# Altium PCB PCB2.PcbDoc
Units mm, origin at the board's own origin, x right, y up, seen from the top; angles counter-clockwise.
Board outline 49.4 x 31.11 mm, 2 copper layers (Top Layer, Bottom Layer); 15 components, 15 nets, 52 pads, 1 vias.
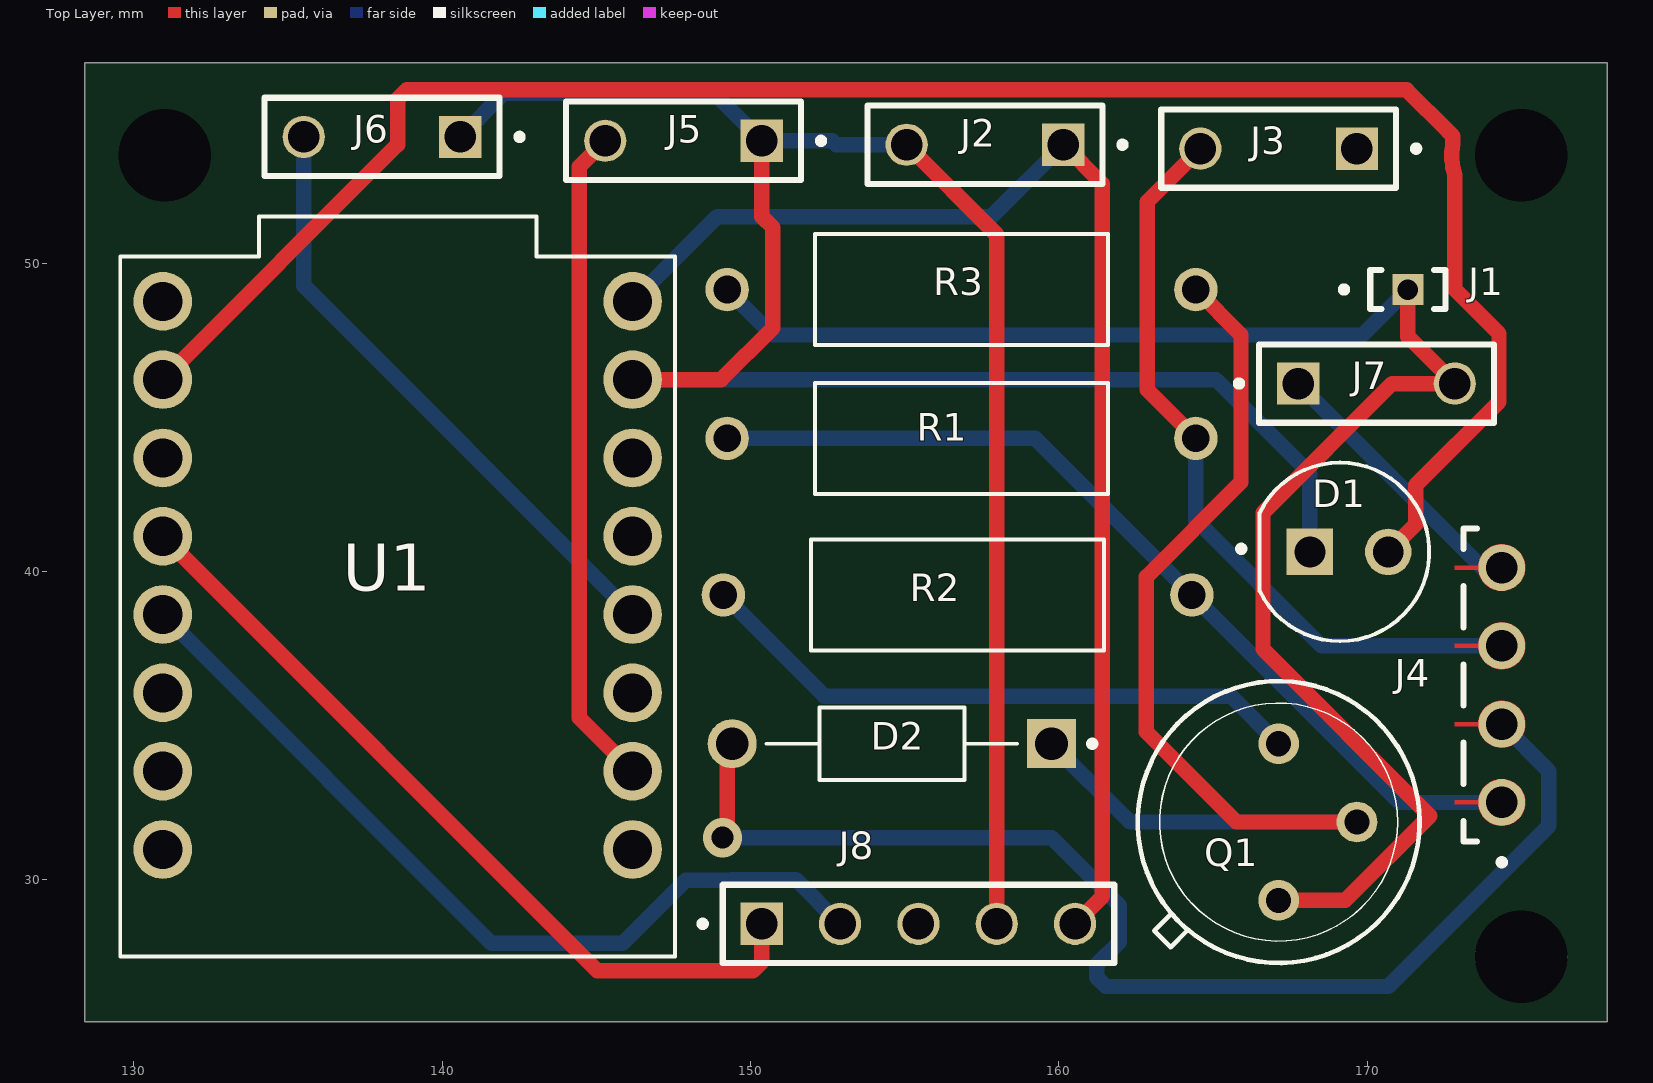
[diagram p0: Top Layer view]
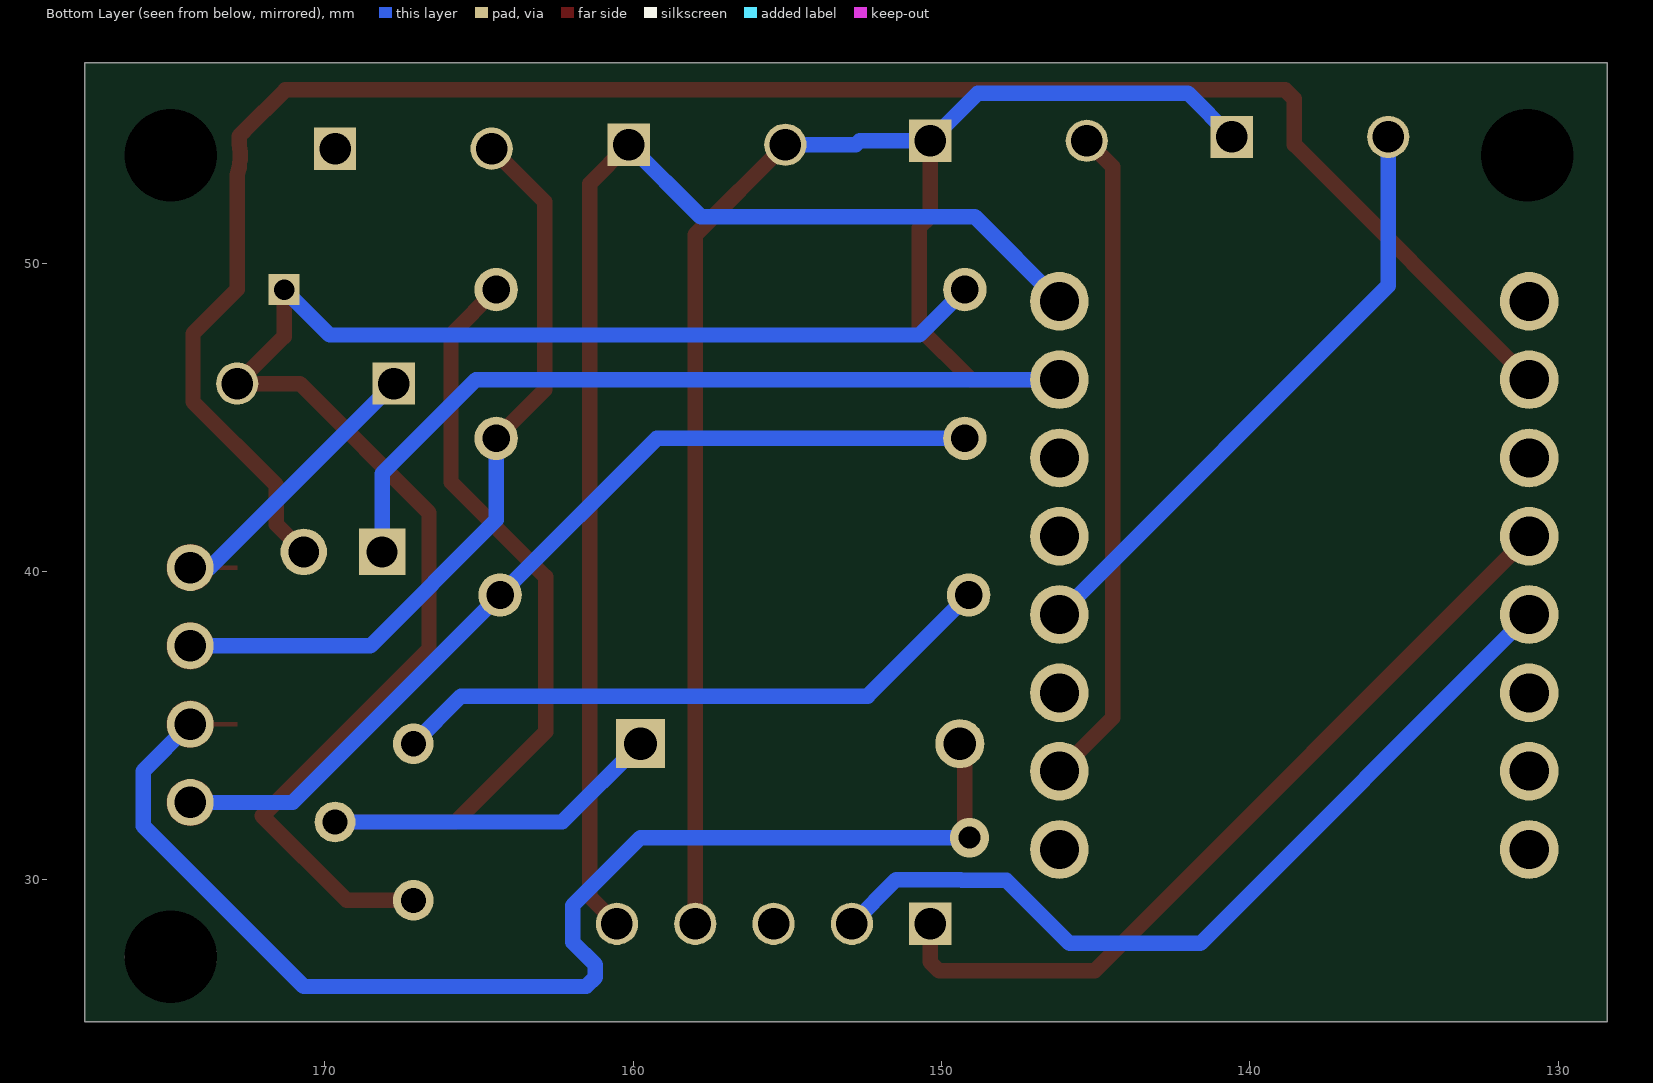
[diagram p1: Bottom Layer view, seen from below]

## Layer stack, top to bottom
Top Solder: solder mask 0.0102, Solder Resist, Dk 3.5
Top Layer: signal copper 0.0356
Dielectric 1: dielectric 0.32, FR-4, Dk 4.8
Bottom Layer: signal copper 0.0356
Bottom Solder: solder mask 0.0102, Solder Resist, Dk 3.5

## Board outline
128.397,25.4 177.8,25.4 177.8,56.515 128.397,56.515

## Design rules (kind name [scope] priority, off if disabled: settings)
Clearance [All] p1: gap=0.5 ignorepadtopadclearanceinfootprint=FALSE
PolygonConnect [All] p1: connectstyle=Relief reliefconductorwidth=0.254 reliefentries=4 polygonreliefangle="90 Angle" airgapwidth=0.254
RoutingVias [All] p1: holewidth=0.711 width=1.27 viastyle="Through Hole" minholewidth=0.711 minwidth=1.27 maxholewidth=0.711 maxwidth=1.27
SilkToSilkClearance [All] p1: silktosilkclearance=0.2
SilkToSolderMaskClearance [IsPad] p1 off: minsilkscreentomaskgap=0.21 clearancetoexposedcopper=TRUE
SolderMaskExpansion [All] p1: expansion=0.102 istentingtop=FALSE
Width [All] p1: maxlimit=1 minlimit=0.4 preferedwidth=0.5
28 further rules are at their usual default settings.

## Components (designator, comment, footprint, x,y, rotation, side; value= is the part's Value field where it differs from the comment)
D1 "151054RS03000" LED_151054RS03000 169.418,40.64 r0 top
D2 "1N4007G" DIOAD1036W78L470D235 154.586,34.417 r180 top
J1 "BAT-" SAMTEC_TMS-101-21-G-S 171.323,49.149 r90 top
J2 "S4" ? 160.147,53.848 r180 top
J3 "S1" ? 169.672,53.721 r180 top
J4 "RGB led" SAMTEC_MTLW-104-X-X-S-X 174.371,36.322 r270 top
J5 "S2" ? 150.368,53.975 r180 top
J6 "S3" ? 140.589,54.102 r180 top
J7 "S4" ? 167.767,46.101 r0 top
J8 "RTC" SAMTEC_TSW-105-23-L-S 150.368,28.575 r0 top
Q1 "BC547*" TO39 167.132,31.877 r0 top
R1 "1K" RESAD1520W70L1030D380 156.845,44.323 r180 top
R2 "220R" RESAD1520W70L1030D380 156.718,39.243 r180 top
R3 "1K" RESAD1520W70L1030D380 156.845,49.149 r180 top
U1 "ESP32-C3_SUPERMINI" MODULE_ESP32-C3_SUPERMINI 138.557,38.868 r0 top

## Footprints (in the part's own frame and the unit in brackets; to place one, negate y for a bottom-side part, rotate by r counter-clockwise, add the part's x,y. Pads: shape width x height; smd on the part's side, far side on the other; paste and mask are expansions set on the pad)
DIOAD1036W78L470D235 [mm]
  round 1.59 hole 1.06: A(5.18,0)
  rect 1.59x1.59 / inner round 1.59 / far side rect 1.59x1.59 hole 1.06: C(-5.18,0)
  silkscreen extent -6.6,-1.18 4.06,1.18, body extent -5.65,-1.4 5.65,1.4, height 2.8
LED_151054RS03000 [mm]
  round 1.508 hole 1: A(1.27,0)
  rect 1.508x1.508 / inner round 1.508 / far side rect 1.508x1.508 hole 1: C(-1.27,0)
  silkscreen extent -3.6,-2.9 2.6,2.9, body extent -2.9,-2.9 2.51,2.9, height 12.1
MODULE_ESP32-C3_SUPERMINI [mm]
  round 1.905 hole 1.27: 0(7.62,-7.88) 1(7.62,-5.34) 2(7.62,-2.8) 3(7.62,-0.26) 3.3(7.62,4.82) 4(7.62,2.28) 5(-7.62,9.9) 5V(7.62,9.9) 6(-7.62,7.36) 7(-7.62,4.82) 8(-7.62,2.28) 9(-7.62,-0.26) 10(-7.62,-2.8) 20(-7.62,-5.34) 21(-7.62,-7.88) G(7.62,7.36)
  silkscreen extent -9,-11.35 9,12.65
RESAD1520W70L1030D380 [mm]
  round 1.408 hole 0.9: 1(-7.6,0) 2(7.6,0)
  silkscreen extent -4.75,-1.8 4.75,1.8, body extent -6.3,-1.53 6.3,1.27, height 2.92
SAMTEC_MTLW-104-X-X-S-X [mm]
  round 1.52 hole 1.02: 01(3.81,0) 02(1.27,0) 03(-1.27,0) 04(-3.81,0)
  Top Layer region: 3.889,0.756 3.968,0.743 4.045,0.723 4.119,0.694 4.19,0.658 4.257,0.615 4.319,0.565 4.375,0.509 4.425,0.447 4.468,0.38 4.504,0.309 4.533,0.235 4.553,0.158 4.566,0.079 4.57,0 4.569,-0.038 4.566,-0.076 4.562,-0.113 4.555,-0.151 4.547,-0.187 4.537,-0.224 4.525,-0.259 4.511,-0.294 4.496,-0.329 4.479,-0.363 4.46,-0.395 4.44,-0.427 4.418,-0.458 4.395,-0.487 4.37,-0.516 4.344,-0.543 4.316,-0.569 4.287,-0.593 4.258,-0.616 4.227,-0.638 4.195,-0.658 4.162,-0.676 4.128,-0.692 4.093,-0.707 4.058,-0.721 4.022,-0.732 3.986,-0.742 3.949,-0.75 3.912,-0.756 3.875,-0.76 3.875,-1.53 3.745,-1.53 3.745,-0.76 3.708,-0.756 3.671,-0.75 3.634,-0.742 3.598,-0.732 3.562,-0.721 3.527,-0.707 3.492,-0.692 3.458,-0.676 3.425,-0.658 3.393,-0.638 3.362,-0.616 3.333,-0.593 3.304,-0.569 3.276,-0.543 3.25,-0.516 3.225,-0.487 3.202,-0.458 3.18,-0.427 3.16,-0.395 3.141,-0.363 3.124,-0.329 3.109,-0.294 3.095,-0.259 3.083,-0.224 3.073,-0.187 3.065,-0.151 3.058,-0.113 3.054,-0.076 3.051,-0.038 3.05,0 3.054,0.079 3.067,0.158 3.087,0.235 3.116,0.309 3.152,0.38 3.195,0.447 3.245,0.509 3.301,0.565 3.363,0.615 3.43,0.658 3.501,0.694 3.575,0.723 3.652,0.743 3.731,0.756 3.81,0.76
  Top Layer region: 1.349,0.756 1.428,0.743 1.505,0.723 1.579,0.694 1.65,0.658 1.717,0.615 1.779,0.565 1.835,0.509 1.885,0.447 1.928,0.38 1.964,0.309 1.993,0.235 2.013,0.158 2.026,0.079 2.03,0 2.029,-0.038 2.026,-0.076 2.022,-0.113 2.015,-0.151 2.007,-0.187 1.997,-0.224 1.985,-0.259 1.971,-0.294 1.956,-0.329 1.939,-0.363 1.92,-0.395 1.9,-0.427 1.878,-0.458 1.855,-0.487 1.83,-0.516 1.804,-0.543 1.776,-0.569 1.747,-0.593 1.718,-0.616 1.687,-0.638 1.655,-0.658 1.622,-0.676 1.588,-0.692 1.553,-0.707 1.518,-0.721 1.482,-0.732 1.446,-0.742 1.409,-0.75 1.372,-0.756 1.335,-0.76 1.335,-1.53 1.205,-1.53 1.205,-0.76 1.168,-0.756 1.131,-0.75 1.094,-0.742 1.058,-0.732 1.022,-0.721 0.987,-0.707 0.952,-0.692 0.918,-0.676 0.885,-0.658 0.853,-0.638 0.822,-0.616 0.793,-0.593 0.764,-0.569 0.736,-0.543 0.71,-0.516 0.685,-0.487 0.662,-0.458 0.64,-0.427 0.62,-0.395 0.601,-0.363 0.584,-0.329 0.569,-0.294 0.555,-0.259 0.543,-0.224 0.533,-0.187 0.525,-0.151 0.518,-0.113 0.514,-0.076 0.511,-0.038 0.51,0 0.514,0.079 0.527,0.158 0.547,0.235 0.576,0.309 0.612,0.38 0.655,0.447 0.705,0.509 0.761,0.565 0.823,0.615 0.89,0.658 0.961,0.694 1.035,0.723 1.112,0.743 1.191,0.756 1.27,0.76
  Top Layer region: -1.191,0.756 -1.112,0.743 -1.035,0.723 -0.961,0.694 -0.89,0.658 -0.823,0.615 -0.761,0.565 -0.705,0.509 -0.655,0.447 -0.612,0.38 -0.576,0.309 -0.547,0.235 -0.527,0.158 -0.514,0.079 -0.51,0 -0.511,-0.038 -0.514,-0.076 -0.518,-0.113 -0.525,-0.151 -0.533,-0.187 -0.543,-0.224 -0.555,-0.259 -0.569,-0.294 -0.584,-0.329 -0.601,-0.363 -0.62,-0.395 -0.64,-0.427 -0.662,-0.458 -0.685,-0.487 -0.71,-0.516 -0.736,-0.543 -0.764,-0.569 -0.793,-0.593 -0.822,-0.616 -0.853,-0.638 -0.885,-0.658 -0.918,-0.676 -0.952,-0.692 -0.987,-0.707 -1.022,-0.721 -1.058,-0.732 -1.094,-0.742 -1.131,-0.75 -1.168,-0.756 -1.205,-0.76 -1.205,-1.53 -1.335,-1.53 -1.335,-0.76 -1.372,-0.756 -1.409,-0.75 -1.446,-0.742 -1.482,-0.732 -1.518,-0.721 -1.553,-0.707 -1.588,-0.692 -1.622,-0.676 -1.655,-0.658 -1.687,-0.638 -1.718,-0.616 -1.747,-0.593 -1.776,-0.569 -1.804,-0.543 -1.83,-0.516 -1.855,-0.487 -1.878,-0.458 -1.9,-0.427 -1.92,-0.395 -1.939,-0.363 -1.956,-0.329 -1.971,-0.294 -1.985,-0.259 -1.997,-0.224 -2.007,-0.187 -2.015,-0.151 -2.022,-0.113 -2.026,-0.076 -2.029,-0.038 -2.03,0 -2.026,0.079 -2.013,0.158 -1.993,0.235 -1.964,0.309 -1.928,0.38 -1.885,0.447 -1.835,0.509 -1.779,0.565 -1.717,0.615 -1.65,0.658 -1.579,0.694 -1.505,0.723 -1.428,0.743 -1.349,0.756 -1.27,0.76
  Top Layer region: -3.731,0.756 -3.652,0.743 -3.575,0.723 -3.501,0.694 -3.43,0.658 -3.363,0.615 -3.301,0.565 -3.245,0.509 -3.195,0.447 -3.152,0.38 -3.116,0.309 -3.087,0.235 -3.067,0.158 -3.054,0.079 -3.05,0 -3.051,-0.038 -3.054,-0.076 -3.058,-0.113 -3.065,-0.151 -3.073,-0.187 -3.083,-0.224 -3.095,-0.259 -3.109,-0.294 -3.124,-0.329 -3.141,-0.363 -3.16,-0.395 -3.18,-0.427 -3.202,-0.458 -3.225,-0.487 -3.25,-0.516 -3.276,-0.543 -3.304,-0.569 -3.333,-0.593 -3.362,-0.616 -3.393,-0.638 -3.425,-0.658 -3.458,-0.676 -3.492,-0.692 -3.527,-0.707 -3.562,-0.721 -3.598,-0.732 -3.634,-0.742 -3.671,-0.75 -3.708,-0.756 -3.745,-0.76 -3.745,-1.53 -3.875,-1.53 -3.875,-0.76 -3.912,-0.756 -3.949,-0.75 -3.986,-0.742 -4.022,-0.732 -4.058,-0.721 -4.093,-0.707 -4.128,-0.692 -4.162,-0.676 -4.195,-0.658 -4.227,-0.638 -4.258,-0.616 -4.287,-0.593 -4.316,-0.569 -4.344,-0.543 -4.37,-0.516 -4.395,-0.487 -4.418,-0.458 -4.44,-0.427 -4.46,-0.395 -4.479,-0.363 -4.496,-0.329 -4.511,-0.294 -4.525,-0.259 -4.537,-0.224 -4.547,-0.187 -4.555,-0.151 -4.562,-0.113 -4.566,-0.076 -4.569,-0.038 -4.57,0 -4.566,0.079 -4.553,0.158 -4.533,0.235 -4.504,0.309 -4.468,0.38 -4.425,0.447 -4.375,0.509 -4.319,0.565 -4.257,0.615 -4.19,0.658 -4.119,0.694 -4.045,0.723 -3.968,0.743 -3.889,0.756 -3.81,0.76
  silkscreen extent -5.08,-1.25 5.85,0.1
SAMTEC_TMS-101-21-G-S [mm]
  rect 1.01x1.01 / inner round 1.01 / far side rect 1.01x1.01 hole 0.66: 01(0,0)
  silkscreen extent -0.64,-1.22 0.64,2.17
SAMTEC_TSW-105-23-L-S [mm]
  rect 1.37x1.37 hole 1.02: 01(0,0)
  round 1.37 hole 1.02: 02(2.54,0) 03(5.08,0) 04(7.62,0) 05(10.16,0)
  silkscreen extent -2.02,-1.27 11.43,1.27
TO39 [mil]
  round 52 hole 32: 1(0,-100) 2(100,0) 3(0,100)
  silkscreen extent -180,-180 180,180, body extent -180,-180 180,180, height 260
? [mm]
  rect 1.37x1.37 hole 1.02: 01(0,0)
  round 1.37 hole 1.02: 02(5.08,0)
  silkscreen extent -2.02,-1.27 6.35,1.27

## Part data
D1: "Red 623nm LED Indication - Discrete 1.9V Radial", Package="Radial Wurth Elektronik", Availability="In Stock", Check_prices=https://www.snapeda.com/parts/151054RS03000/Wurth+Elektronik/view-part/?ref=eda, MF="Wurth Elektronik", MP=151054RS03000, Price=None, Purchase-URL=https://pricing.snapeda.com/search/part/151054RS03000/?ref=eda, SnapEDA_Link=https://www.snapeda.com/parts/151054RS03000/Wurth+Elektronik/view-part/?ref=snap
D2: "1A, 1000V, Standard Recovery Rectifier", Package="DO-41 Taiwan Semiconductor", Availability="In Stock", Check_prices=https://www.snapeda.com/parts/1N4007G/Taiwan+Semiconductor/view-part/?ref=eda, MF="Taiwan Semiconductor", MP=1N4007G, Price=None, Purchase-URL=https://pricing.snapeda.com/search/part/1N4007G/?ref=eda, SnapEDA_Link=https://www.snapeda.com/parts/1N4007G/Taiwan+Semiconductor/view-part/?ref=snap
J1: library part TMS-101-21-G-S, "Connector Header Through Hole 1 position", Package=None, Availability="In Stock", Check_prices=https://www.snapeda.com/parts/TMS-101-21-G-S/Samtec/view-part/?ref=eda, MF=Samtec, MP=TMS-101-21-G-S, Price=None, Purchase-URL=https://pricing.snapeda.com/search/part/TMS-101-21-G-S/?ref=eda, SnapEDA_Link=https://www.snapeda.com/parts/TMS-101-21-G-S/Samtec/view-part/?ref=snap
J2 J3 J5 J6 J7: library part TSW-202-07-T-S, Package=None, Availability=Unavailable, MP=TSW-202-07-T-S, Price=None
J4: library part MTLW-104-X-X-S-X, Package=None, Availability=Unavailable, MF="{'manufacturer': u'Samtec Inc.'}", MP=MTLW-104-X-X-S-X, Price=None
J8: library part TSW-105-23-L-S, "Connector Header Through Hole 5 position 0.100 (2.54mm)", Package=None, Check_prices=https://www.snapeda.com/parts/TSW-105-23-L-S/Samtec/view-part/?ref=eda, Digi-Key_Part_Number=SAM1071-05-ND, MF=Samtec, MP=TSW-105-23-L-S, Purchase-URL=https://pricing.snapeda.com/search/part/TSW-105-23-L-S/?ref=eda, SnapEDA_Link=https://www.snapeda.com/parts/TSW-105-23-L-S/Samtec/view-part/?ref=snap
Q1: "Trans GP BJT NPN 45V 0.1A 500mW 3-Pin TO-92 T/R", Package=None, Check_prices=https://www.snapeda.com/parts/BC547/Onsemi/view-part/?ref=eda, MF="ON Semiconductor", MP=BC547, SnapEDA_Link=https://www.snapeda.com/parts/BC547/Onsemi/view-part/?ref=snap
R1 R2 R3: library part CBT50J5R1, "5.1 Ohms Â±5% 0.5W, 1/2W Through Hole Resistor Axial Pulse Withstanding Carbon Composition", Package="Axial TE Connectivity / AMP", Availability="In Stock", Check_prices=https://www.snapeda.com/parts/CBT50J5R1/TE+Connectivity+%252F+AMP/view-part/?ref=eda, MF="TE Connectivity / AMP", MP=CBT50J5R1, Price=None, Purchase-URL=https://pricing.snapeda.com/search/part/CBT50J5R1/?ref=eda, SnapEDA_Link=https://www.snapeda.com/parts/CBT50J5R1/TE+Connectivity+%252F+AMP/view-part/?ref=snap
U1: "Super tiny ESP32-C3 board", Package=Package, Check_prices=https://www.snapeda.com/parts/ESP32-C3%20SuperMini/Espressif+Systems/view-part/?ref=eda, MF="Espressif Systems", MP="ESP32-C3 SuperMini", SnapEDA_Link=https://www.snapeda.com/parts/ESP32-C3%20SuperMini/Espressif+Systems/view-part/?ref=snap

## Free pads (board coordinates)
  round 1.65 hole 3: ""(131,53.5) ""(175,53.5)
  oval 3x1.65 hole 3: ""(175,27.5)

## Via types
v1: diameter 1.27, hole 0.711, Top Layer to Bottom Layer, 1 vias

## Nets (pads, with @x,y where several pads share a name; then routed paths per layer and width w, separated by ;. In a path a pad name is that pad's centre, name@x,y a point inside that pad or via, vN(x,y) a via of type N, cw(c..) or ccw(c..) an arc to the next point about the centre after c; other vN are vias at no path point)
BAT+: J3.01
GND1: D1.C J2.02 J5.01 J6.01 J8.04 U1.G | length 79.5
  Top Layer w0.5: U1.G 149.047,46.228 150.724,47.904 150.724,51.156 150.368,51.511 J5.01 ; J2.02 157.988,50.927 J8.04
  Bottom Layer w0.5: J6.01 142.011,55.524 148.819,55.524 J5.01 152.654,53.975 152.781,53.848 J2.02 ; U1.G 165.1,46.228 168.148,43.18 D1.C
GND2: J1.01 J7.02 Q1.1 R3.2 | length 53
  Top Layer w0.5: Q1.1 169.291,29.337 172.034,32.08 166.624,37.49 166.624,41.91 170.815,46.101 J7.02 171.323,47.625 J1.01
  Bottom Layer w0.5: R3.2 150.718,47.676 169.85,47.676 J1.01
NetD1_A: D1.A U1.6 | length 62.8
  Top Layer w0.5: U1.6 138.557,53.848 138.557,55.333 138.703,55.48 138.85,55.626 171.284,55.626 172.636,54.274 172.782,54.128 172.782,53.921 172.782,53.88 ccw(c175,53.5) 172.847,52.847 172.847,49.152 172.993,49.006 174.282,47.717 174.282,45.507 171.577,42.802 171.577,41.529 D1.A
NetD2_A: D2.A J4.02 | length 40.5
  Top Layer w0.5: v1(149.098,31.369) 149.245,31.516 149.245,34.256 D2.A
  Bottom Layer w0.5: v1(149.098,31.369) 159.763,31.369 161.963,29.169 161.963,27.981 161.232,27.25 161.232,26.836 161.525,26.543 170.688,26.543 175.895,31.75 175.895,33.528 J4.02
NetD2_C: D2.C Q1.2 R3.1 | length 35.2
  Top Layer w0.5: R3.1 165.913,47.681 165.913,42.901 162.839,39.827 162.839,34.798 165.76,31.877 Q1.2
  Bottom Layer w0.5: D2.C 162.306,31.877 Q1.2
NetJ4_01: J4.01 R1.2 R2.1 | length 30
  Bottom Layer w0.5: R1.2 159.238,44.323 R2.1 171.049,32.512 J4.01
NetJ4_04: J4.04 J7.01 | length 9.1
  Bottom Layer w0.5: J7.01 173.736,40.132 J4.04
NetJ5_02: J5.02 U1.1 | length 21.5
  Top Layer w0.5: J5.02 144.45,53.137 144.45,35.255 U1.1
NetJ6_02: J6.02 U1.3 | length 19.9
  Bottom Layer w0.5: J6.02 135.509,49.276 U1.3
NetJ8_01: J8.01 U1.8 | length 26.6
  Top Layer w0.5: U1.8 145.034,27.051 150.075,27.051 150.368,27.344 J8.01
NetJ8_02: J8.02 U1.9 | length 27.8
  Bottom Layer w0.5: U1.9 141.605,27.94 145.847,27.94 147.891,29.984 149.346,29.984 149.372,30.01 151.473,30.01 J8.02
NetQ1_3: Q1.3 R2.2 | length 20
  Bottom Layer w0.5: R2.2 152.399,35.962 165.587,35.962 Q1.3
VCC1: J2.01 J8.05 U1.5V | length 42.2
  Top Layer w0.5: J2.01 161.417,52.578 161.417,29.464 J8.05
  Bottom Layer w0.5: U1.5V 148.92,51.511 157.81,51.511 J2.01
VCC2: J3.02 J4.03 R1.1 | length 25
  Top Layer w0.5: R1.1 162.865,45.903 162.865,51.994 J3.02
  Bottom Layer w0.5: R1.1 164.445,41.676 168.529,37.592 J4.03
pads on no net: J8.03 U1.0 U1.2 U1.3.3 U1.4 U1.5 U1.7 U1.10 U1.20 U1.21